# EAGLE board DeviceDimmer1 (EAGLE 5.00)
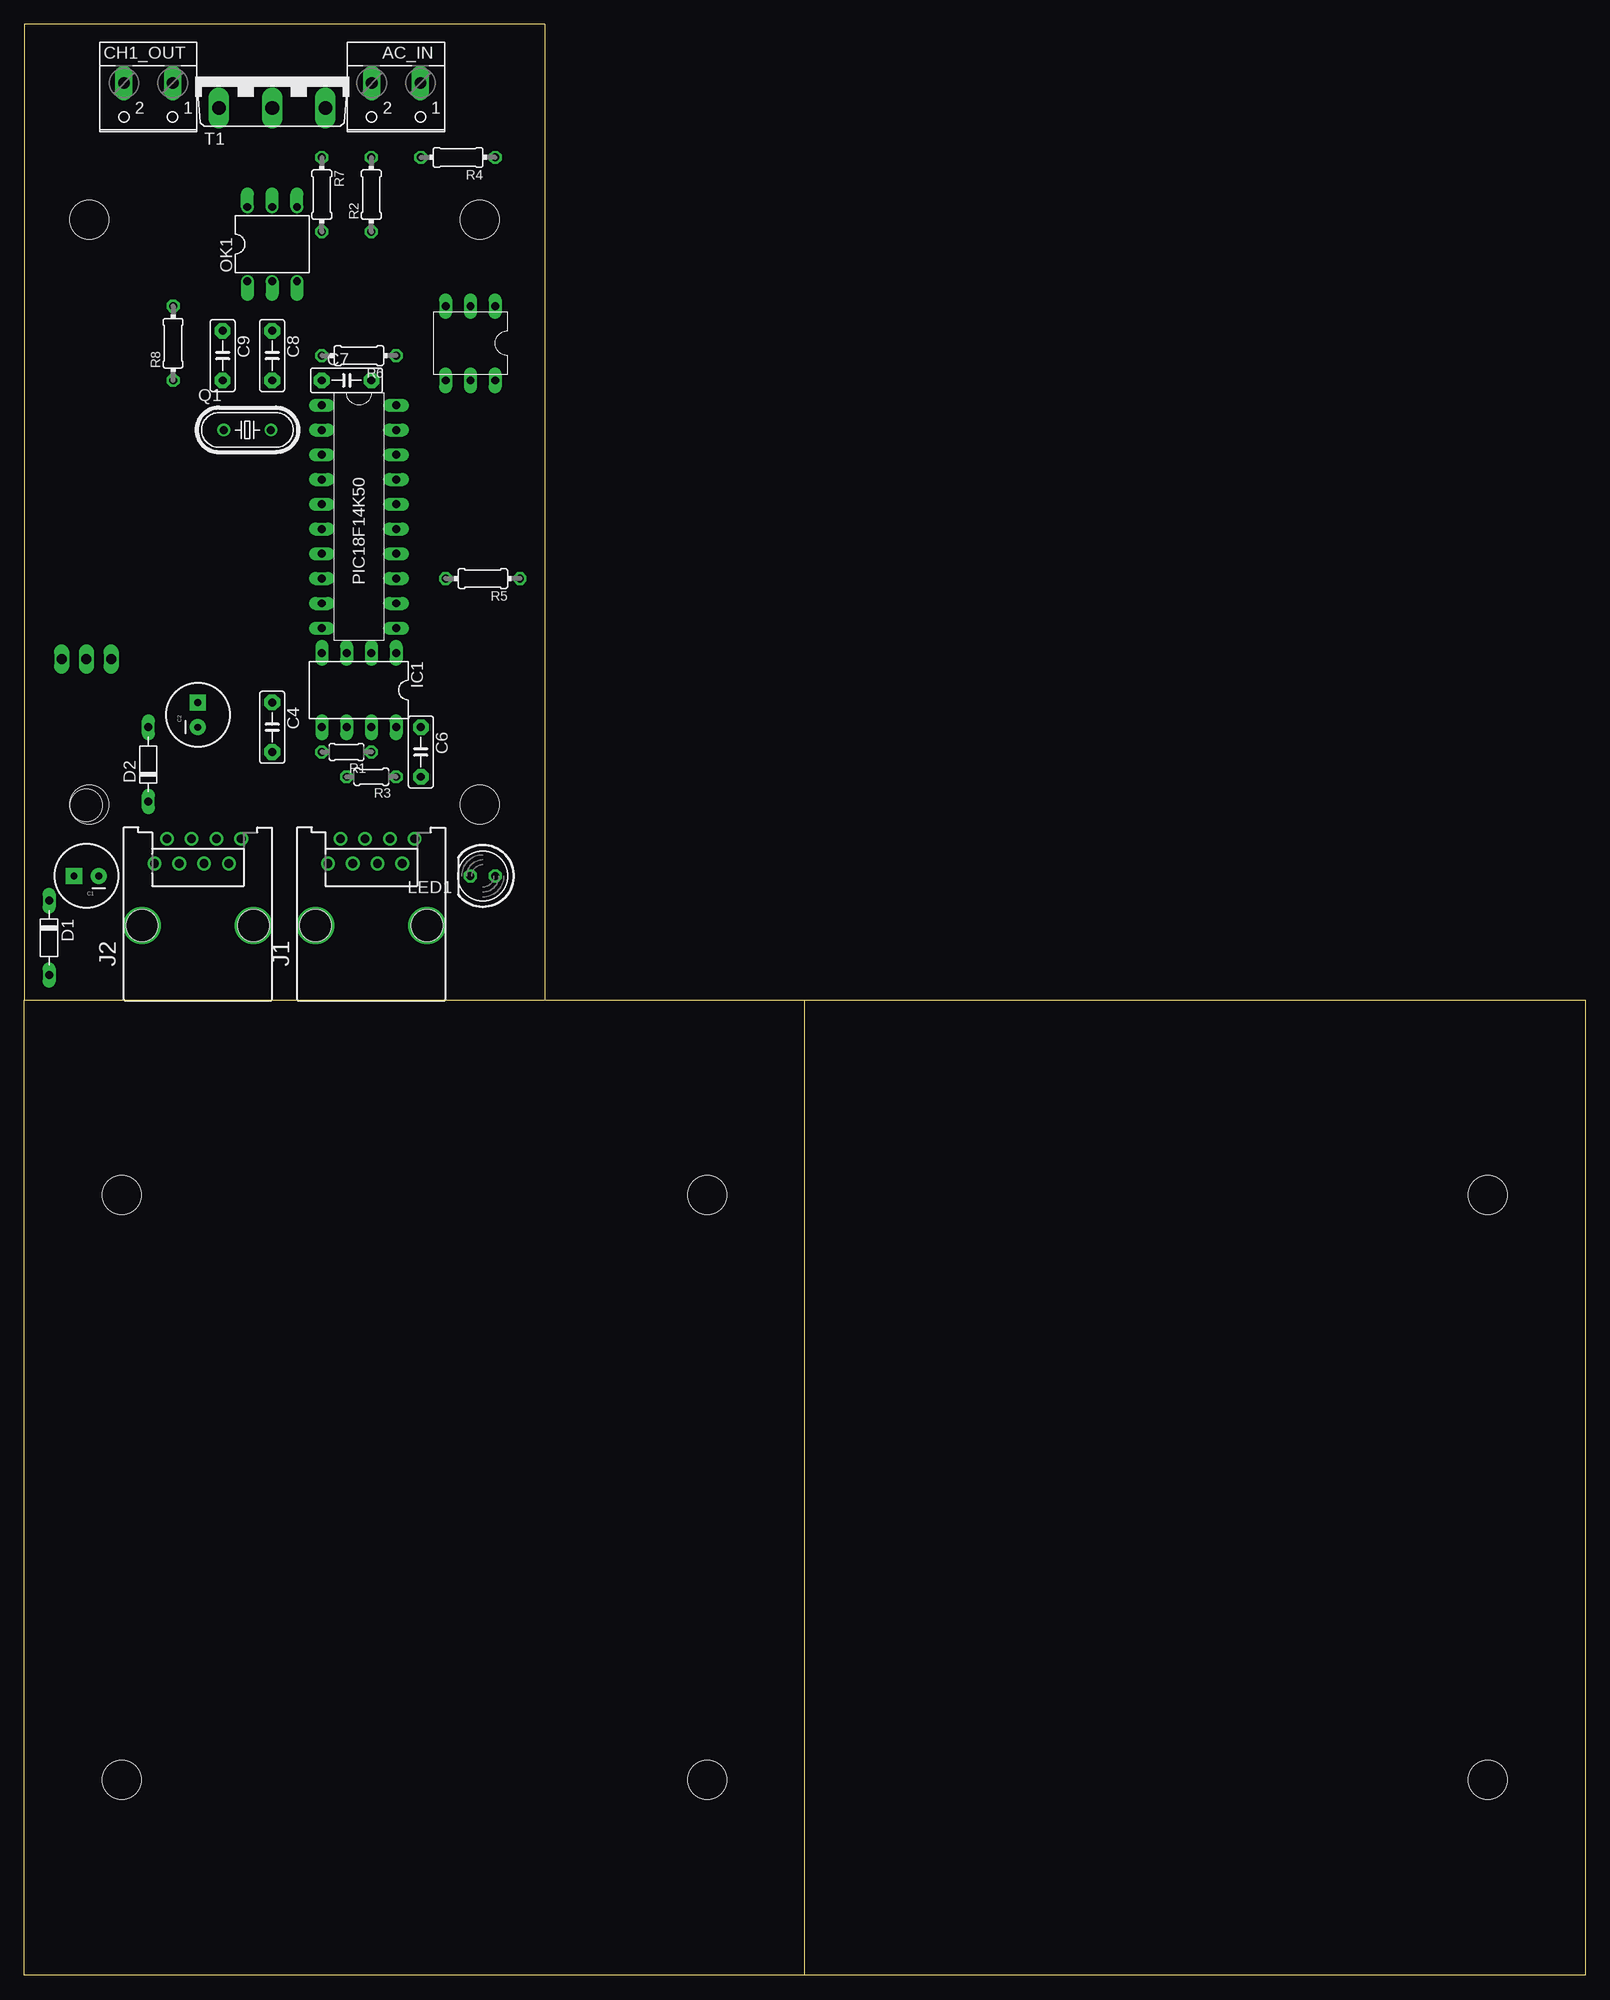
[diagram p0: board, top side]
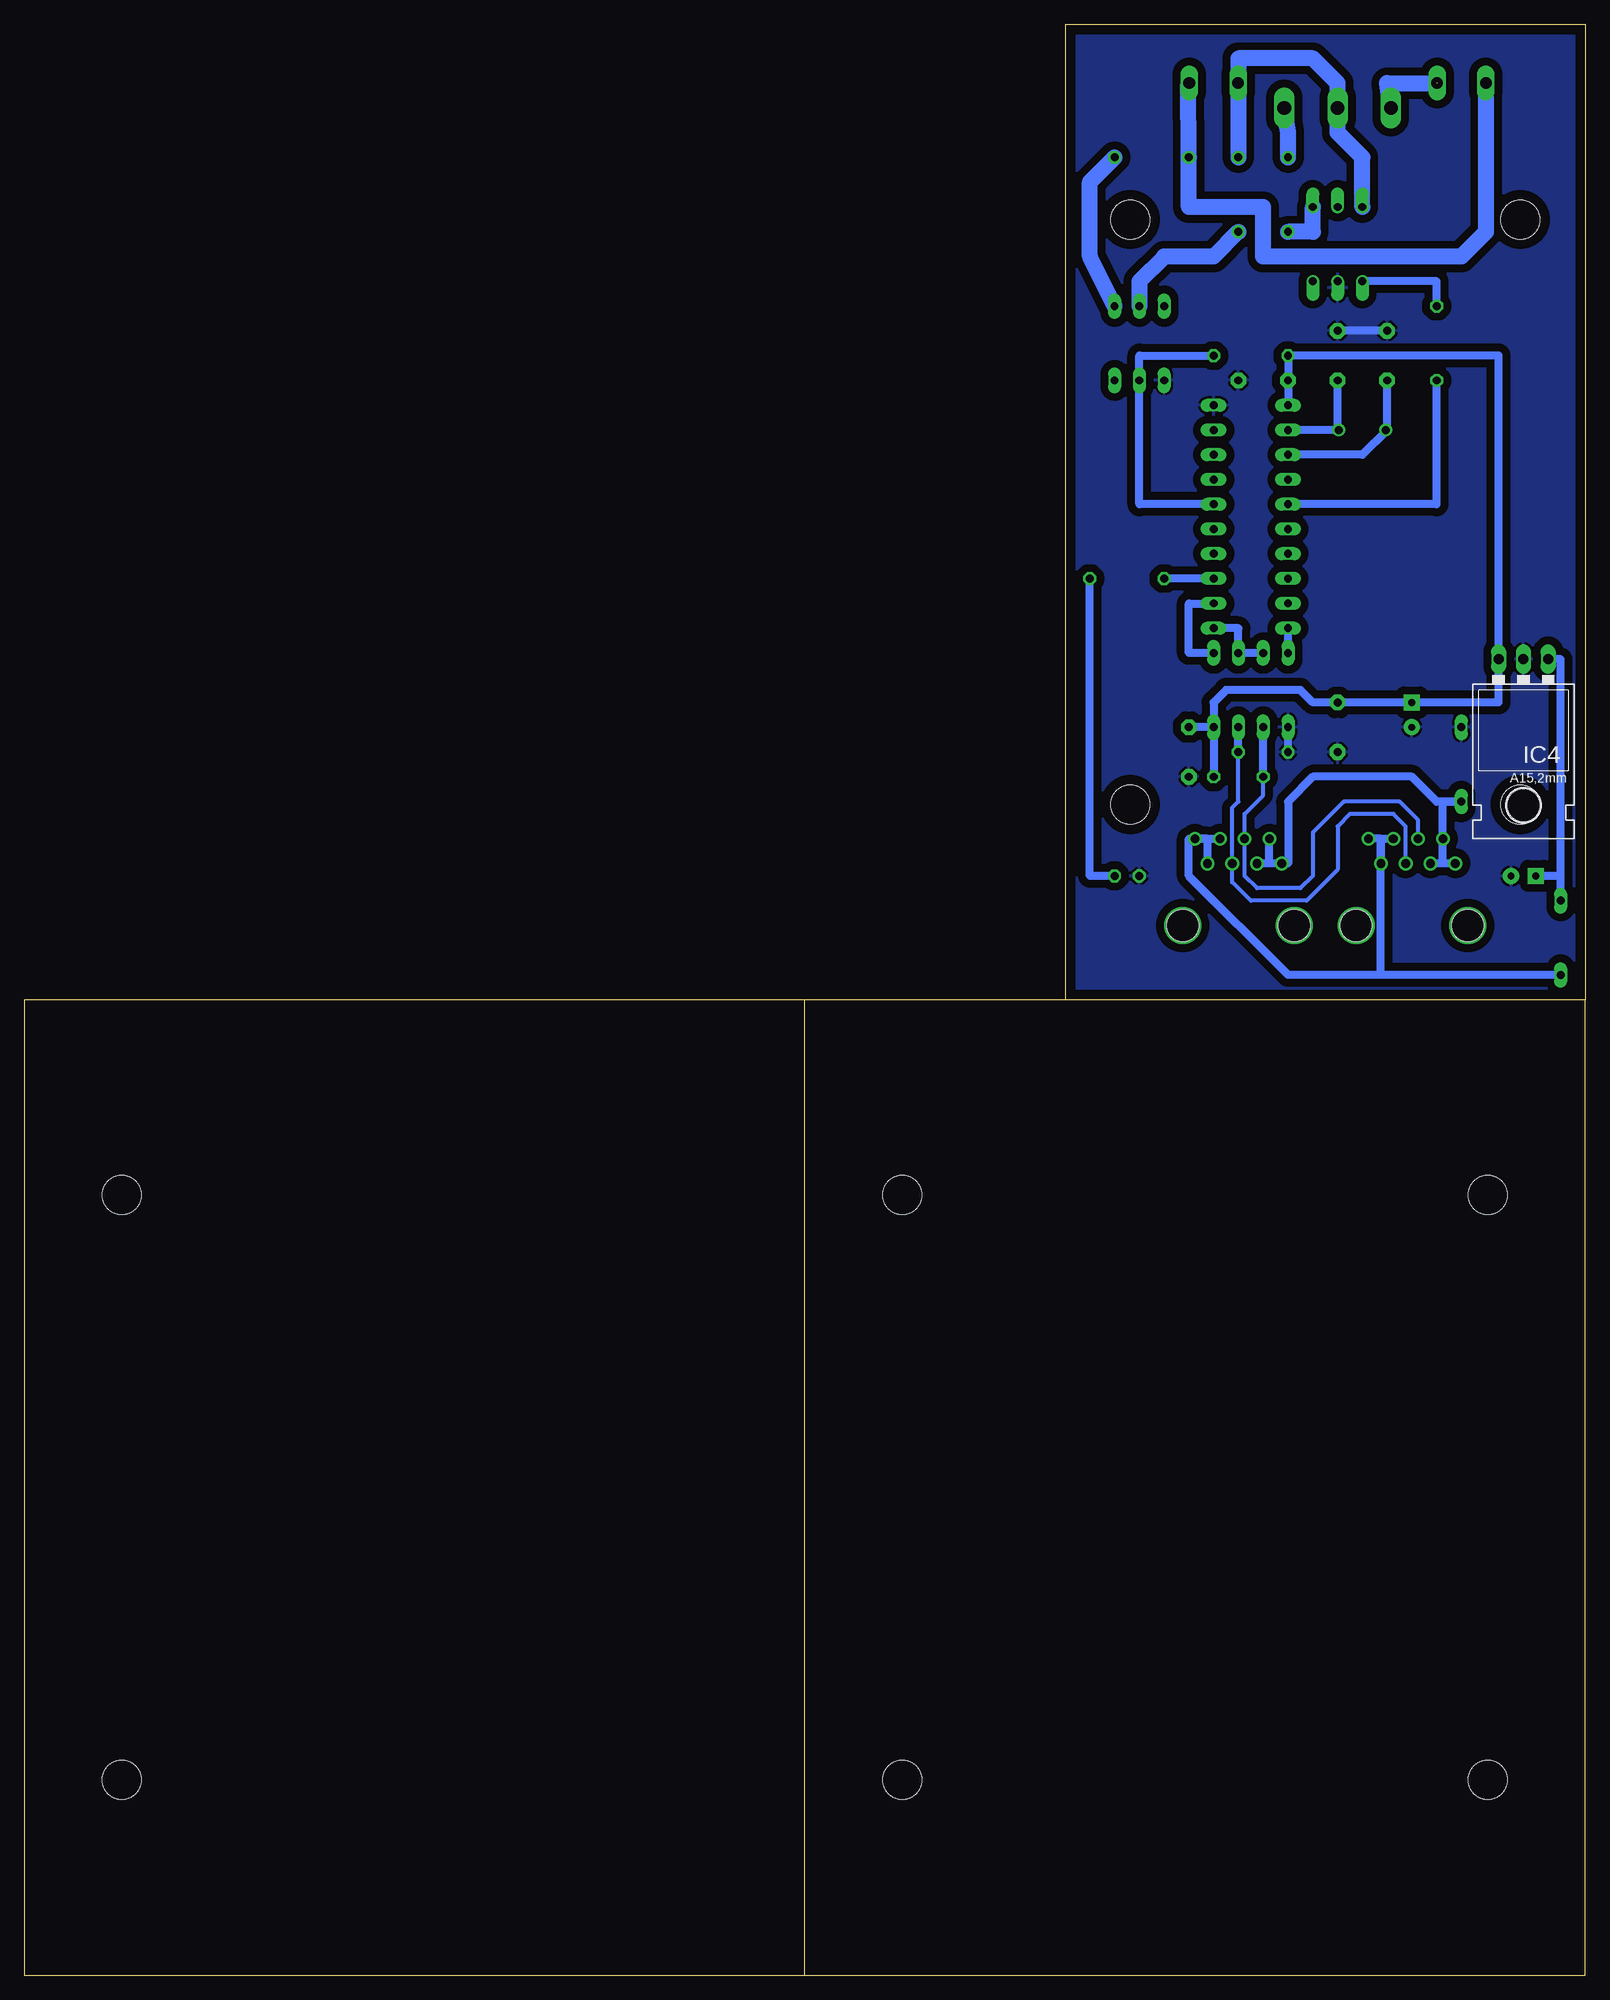
[diagram p1: board, bottom side, seen from below]

Size 160 x 200 mm. Coordinates in mm from the lower left corner, seen from the top.
Outline: 0,100 53.31,100
Outline: 53.31,100 80,100
Outline: 80,100 160,100 160,0 81.26,0
Outline: 81.26,0 80,0 80,100
Outline: 0,100 0,200 53.31,200 53.31,100
Outline: 81.26,0 0,0 0,100
Copper layers (1*16): Top 0.035mm / dielectric 1.5mm / Bottom 0.035mm
Design rules "default": minimum track width 10mil, minimum drill 24mil, track to track 8mil, track to pad 8mil, pad to pad 8mil, via to via 8mil, smd to smd 8mil, copper to edge 40mil, drill to drill 8mil, minimum pad ring 10mil, minimum via ring 8mil, stop-mask expansion 4mil, vias tented up to drill 0mil, thermal gap 10mil
Holes 4 mm at 10,80 10,20 70,20 70,80 150,80 150,20 46.67,120 6.67,120 6.67,180 46.67,180

## Footprints (pad centres in the part's own frame; a part is rotated, then mirrored left to right if it is on the bottom)
W237-102 = drill 1.194 long: 1 -2.5,-1.27; 2 2.5,-1.27
CPOL-RADIAL-100UF-25V = drill 0.7 pad 1.651 square: 1 1.27,0 | drill 0.7 pad 1.651 round: 2 -1.27,0
C5B2.5 = drill 0.813 pad 1.6 octagon: 1 -2.54,0; 2 2.54,0
D-7.5 = drill 0.813 long: A 3.81,0; C -3.81,0
DIL08 = drill 0.813 long: 1 -3.81,-3.81; 2 -1.27,-3.81; 3 1.27,-3.81; 4 3.81,-3.81; 5 3.81,3.81; 6 1.27,3.81; 7 -1.27,3.81; 8 -3.81,3.81
78XXL = drill 1.016 long: GND 0,-3.81; IN -2.54,-3.81; OUT 2.54,-3.81 | hole 3.302: 0,11.176
215877-4 = drill 0.889 round: 1 -4.445,6.35; 2 -3.175,8.89; 3 -1.905,6.35; 4 -0.635,8.89; 5 0.635,6.35; 6 1.905,8.89; 7 3.175,6.35; 8 4.445,8.89 | hole 3.251: -5.715,0; 5.715,0
LED5MM = drill 0.813 octagon: A -1.27,0; K 1.27,0
DIL06 = drill 0.813 offset: 1 -2.54,-3.81; 2 0,-3.81; 3 2.54,-3.81; 4 2.54,3.81; 5 0,3.81; 6 -2.54,3.81
HC49U-V = drill 0.813 round: 1 -2.413,0; 2 2.413,0
0204/5 = drill 0.813 octagon: 1 -2.54,0; 2 2.54,0
0204/7 = drill 0.813 octagon: 1 -3.81,0; 2 3.81,0
TO218DS = drill 1.397 long: A1 -5.461,-3.175; A2 0,-3.175; G 5.461,-3.175
H11A1-DIP = drill 0.8 long: 1 -2.54,1.27; 2 -2.54,-1.27; B 5.08,1.27; C 5.08,-1.27; E 5.08,-3.81; P$2 -2.54,-3.81
PIC18F14K50-E/P = drill 0.813 long: 1 -5.08,12.7; 2 -5.08,10.16; 3 -5.08,7.62; 4 -5.08,5.08; 5 -5.08,2.54; 6 -5.08,0; 7 -5.08,-2.54; 8 -5.08,-5.08; 9 -5.08,-7.62; 10 -5.08,-10.16; 11 2.54,-10.16; 12 2.54,-7.62; 13 2.54,-5.08; 14 2.54,-2.54; 15 2.54,0; 16 2.54,2.54; 17 2.54,5.08; 18 2.54,7.62; 19 2.54,10.16; 20 2.54,12.7

## Placement (x,y rotation side)
AC_IN  [W237-102]  38.1,192.71 180 top
C1  100uf ???  [CPOL-RADIAL-100UF-25V]  6.35,112.7 180 top
C2  10uf  [CPOL-RADIAL-100UF-25V]  17.78,129.21 90 top
C4  100nf  [C5B2.5]  25.4,127.94 270 top
C6  10nf  [C5B2.5]  40.64,125.4 270 top
C7  10nf  [C5B2.5]  33.02,163.5 0 top
C8  22pf  [C5B2.5]  25.4,166.04 270 top
C9  22pf  [C5B2.5]  20.32,166.04 270 top
CH1_OUT  [W237-102]  12.7,192.71 180 top
D1  [D-7.5]  2.54,106.35 270 top
D2  [D-7.5]  12.7,124.13 90 top
IC1  LTC485N  [DIL08]  34.29,131.75 180 top
IC4  [78XXL]  6.35,131.12 180 bottom
J1  [215877-4]  35.56,107.62 0 top
J2  [215877-4]  17.78,107.62 0 top
LED1  [LED5MM]  46.99,112.7 180 top
OK1  MOC3021M  [DIL06]  25.4,177.47 0 top
Q1  12mhz  [HC49U-V]  22.86,158.42 0 top
R1  10K  [0204/5]  33.02,125.4 180 top
R2  1k3  [0204/7]  35.56,182.55 90 top
R3  10K  [0204/5]  35.56,122.86 180 top
R4  1k3  [0204/7]  44.45,186.36 180 top
R5  470  [0204/7]  46.99,143.18 180 top
R6  27k  [0204/7]  34.29,166.04 180 top
R7  750  [0204/7]  30.48,182.55 270 top
R8  680  [0204/7]  15.24,167.31 90 top
T1  TIC253  [TO218DS]  25.4,194.62 0 top
U$1  H11A1  [H11A1-DIP]  46.99,168.58 270 top
U$2  PIC18F14K50-E-P  [PIC18F14K50-E/P]  35.56,148.26 0 top

## Library data of the parts
AC_IN CH1_OUT = con-wago-500
C1 C2 = SparkFun
C4 C6-C9 = capacitor-wima
D1 D2 = diode
IC1 = linear-technology
IC4 = v-reg
J1 J2 = con-amp
LED1 = led
OK1 = optocoupler
Q1 = crystal
R1 R3 = resistor
R2 R4-R8 = rcl
T1 = triac
U$1 = H11A1
U$2 = pic18f14k50

## Nets
5V: C2.1 C4.1 C6.1 C7.1 IC1.8 IC4.OUT R3.1 R6.2 U$2.1
CH1_OUT: AC_IN.1 CH1_OUT.2 R4.2
GND: C1.2 C2.2 C4.2 C6.2 C7.2 C8.1 C9.1 D2.A IC1.5 IC4.GND LED1.K OK1.2 R1.2 U$1.E U$2.20
N$1: LED1.A R5.1
N$2: D1.A J1.6 J1.7 J1.8 J2.6 J2.7 J2.8
N$3: IC1.6 J1.4 J2.4 R3.2
N$4: R5.2 U$2.13
N$5: C1.1 D1.C IC4.IN
N$9: D2.C J1.1 J1.2 J1.3 J2.1 J2.2 J2.3
N$11: R2.1 U$1.2
N$12: R4.1 U$1.1
N$13: R6.1 U$1.C U$2.16
N$14: R8.1 U$2.5
N$15: OK1.1 R8.2
N$16: OK1.4 R7.2
N$17: R7.1 T1.G
N$18: AC_IN.2 OK1.6 R2.2 T1.A2
N$19: CH1_OUT.1 T1.A1
N$50: IC1.7 J1.5 J2.5 R1.1
N$52: C8.2 Q1.2 U$2.2
N$53: C9.2 Q1.1 U$2.3
UART_DIR: IC1.2 IC1.3 U$2.11
UART_RX: IC1.1 U$2.12
UART_TX: IC1.4 U$2.10

## Tracks (layer width: path | path; a pad name or v marks a point on that pad's centre or on a via)
5V
  Bottom 0.813: IC1.8 R3.1 | IC1.8 C6.1 | IC1.8 38.1,130.48 36.83,131.75 29.21,131.75 27.94,130.48 C4.1 C2.1 8.89,130.48 | 8.89,130.48 8.89,166.04 R6.2 C7.1 U$2.1 | 8.89,130.48 IC4.OUT
CH1_OUT
  Bottom 1.626: AC_IN.1 40.64,193.98 40.68,193.94 R4.2 40.64,181.28 33.02,181.28 33.02,176.2 12.7,176.2 10.16,178.74 10.16,191.44 CH1_OUT.2
GND
  Bottom 0.813: C9.1 C8.1 | R1.2 IC1.5
  pour Bottom (isolate 0.813): -1.27,200.33 55.88,200.33 55.88,97.46 -1.27,97.46
N$1
  Bottom 0.813: LED1.A 50.8,112.7 R5.1
N$2
  Bottom 0.813: 38.73,116.51 J1.7 | 38.73,116.51 J1.6 | 38.73,116.51 J1.8 | 38.73,116.51 40.64,116.51 40.64,112.7 30.48,102.54 20.95,102.54 | 20.95,116.51 J2.6 | 20.95,116.51 J2.7 | D1.A 20.95,102.54 | 20.95,116.51 J2.8 | 20.95,102.54 20.95,116.51
N$3
  Bottom 0.406: R3.2 33.02,120.95 34.92,119.05 J1.4 34.92,112.7 33.66,111.43 29.21,111.43 27.94,112.7 27.94,117.14 24.77,120.32 19.05,120.32 17.14,118.41 J2.4
  Bottom 0.813: R3.2 IC1.6
N$4
  Bottom 0.813: U$2.13 R5.2
N$5
  Bottom 0.813: 2.54,112.7 2.54,134.93 IC4.IN | D1.C 2.54,112.7 | 2.54,112.7 C1.1
N$6  (via drill 2.8)
  other vias: 41.27,107.62
N$7  (via drill 2.8)
  other vias: 29.84,107.62
N$8  (via drill 2.8)
  other vias: 23.5,107.62
N$9
  Bottom 0.813: 14.61,113.97 J2.2 14.61,120.32 D2.C 15.24,120.32 17.78,122.86 27.94,122.86 30.48,120.32 30.48,113.97 J1.1 32.38,113.97 | J2.1 14.61,113.97 | 14.61,113.97 J2.3 | 32.38,113.97 J1.3 | 32.38,113.97 J1.2
N$10  (via drill 2.8)
  other vias: 12.06,107.62
N$11
  Bottom 1.626: U$1.2 45.72,173.66 43.18,176.2 38.1,176.2 R2.1
N$12
  Bottom 1.626: U$1.1 50.8,176.2 50.8,183.82 R4.1
N$13
  Bottom 0.813: R6.1 45.72,166.04 U$1.C 45.72,150.8 U$2.16
N$14
  Bottom 0.813: R8.1 15.24,150.8 U$2.5
N$15
  Bottom 0.813: OK1.1 15.24,173.66 R8.2
N$16
  Bottom 1.626: OK1.4 27.94,178.74 R7.2
N$17
  Bottom 1.626: R7.1 30.48,188.9 T1.G
N$18
  Bottom 1.626: 35.56,193.98 R2.2 | 35.56,193.98 AC_IN.2 | 35.56,193.98 35.56,196.52 27.94,196.52 25.4,193.98 T1.A2 25.4,188.9 22.86,186.36 OK1.6
N$19  (1 unrouted)
  Bottom 1.626: T1.A1 20.32,193.98 15.24,193.98
N$50
  Bottom 0.406: R1.1 35.56,120.32 36.2,119.69 J1.5 36.2,112.06 34.29,110.16 28.57,110.16 25.4,113.34 25.4,117.78 24.13,119.05 19.68,119.05 18.41,117.78 J2.5
  Bottom 0.813: R1.1 IC1.7
N$52
  Bottom 0.813: Q1.2 25.4,158.42 | 25.4,158.42 C8.2 | 25.4,158.42 U$2.2
N$53
  Bottom 0.813: 20.32,158.42 Q1.1 20.45,158.29 20.32,158.42 | 20.32,158.42 22.86,155.88 U$2.3 | 20.32,158.42 C9.2
UART_DIR
  Bottom 0.813: IC1.3 IC1.2 35.56,138.1 U$2.11
UART_RX
  Bottom 0.813: IC1.1 40.64,135.56 40.64,140.64 U$2.12
UART_TX
  Bottom 0.813: IC1.4 U$2.10